# Altium PCB ECOSYNC.PcbDoc
Units mm, origin at the board's own origin, x right, y up, seen from the top; angles counter-clockwise.
Board outline 87 x 43 mm, 2 copper layers (Top Layer, Bottom Layer), stack 1.571 mm thick; 23 components, 21 nets, 89 pads, 11 vias.
Unrouted connection lines stored in the file: 1.
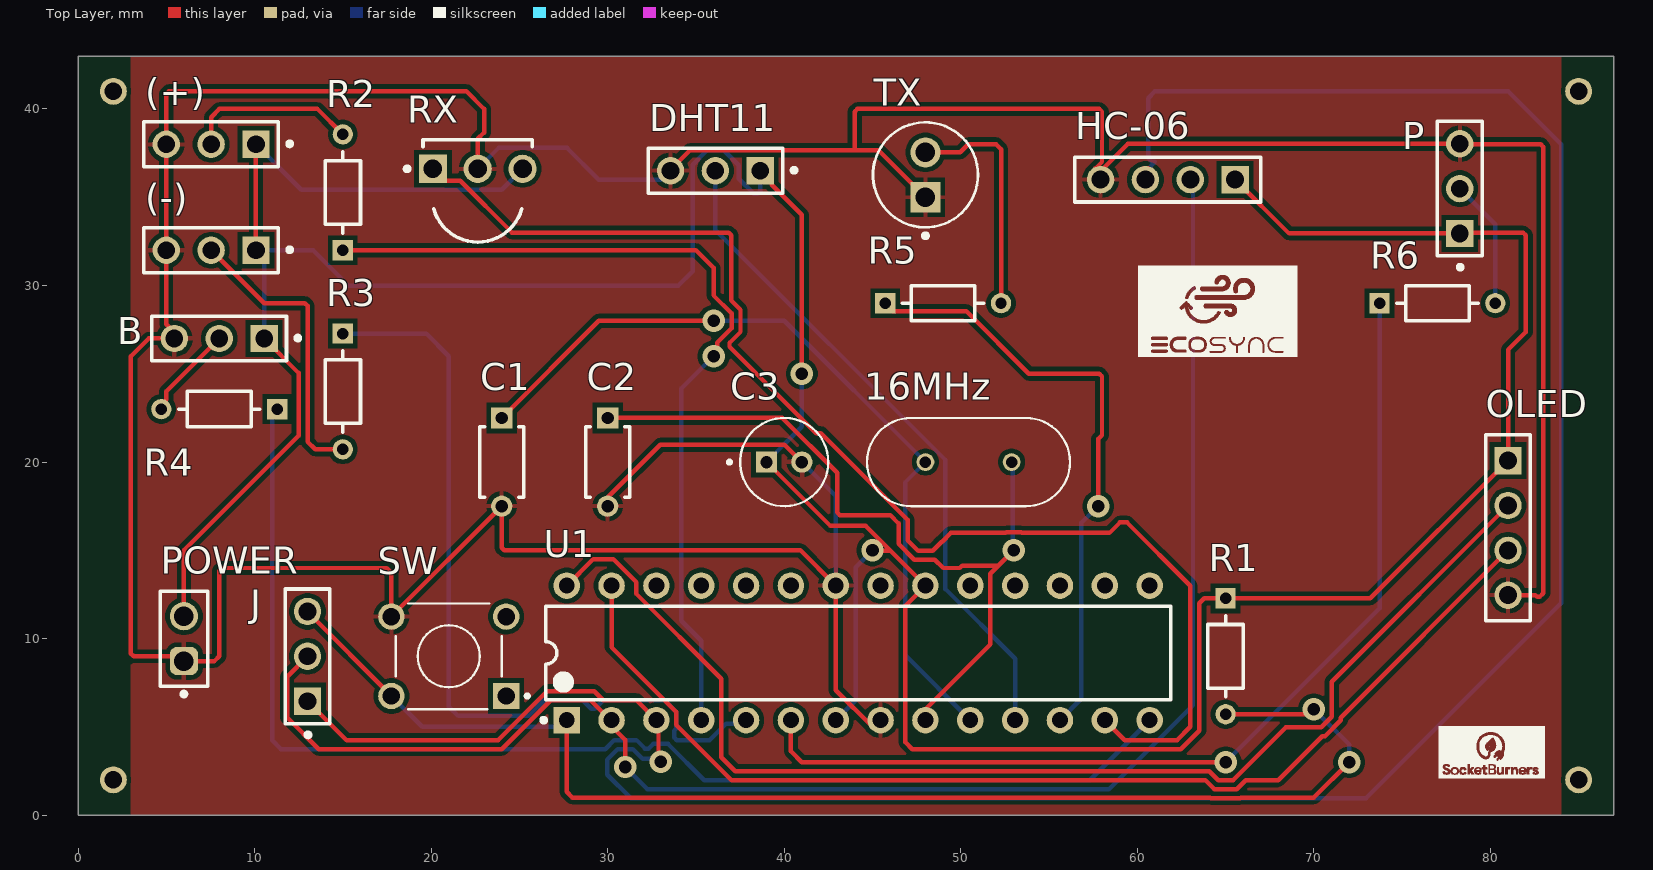
[diagram p0: Top Layer view]
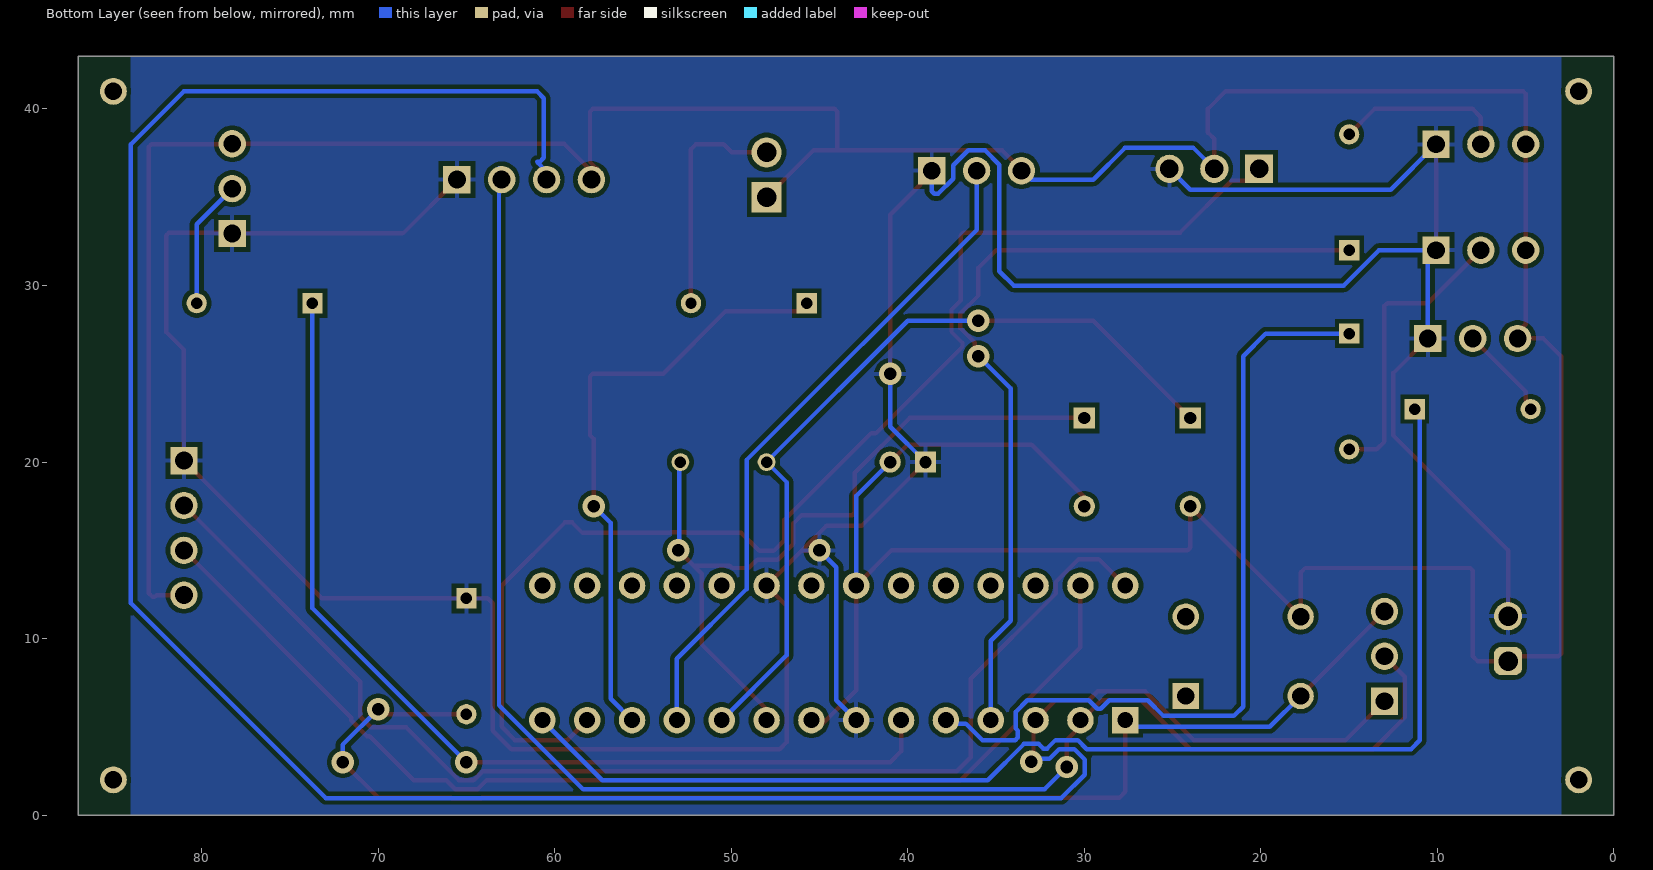
[diagram p1: Bottom Layer view, seen from below]
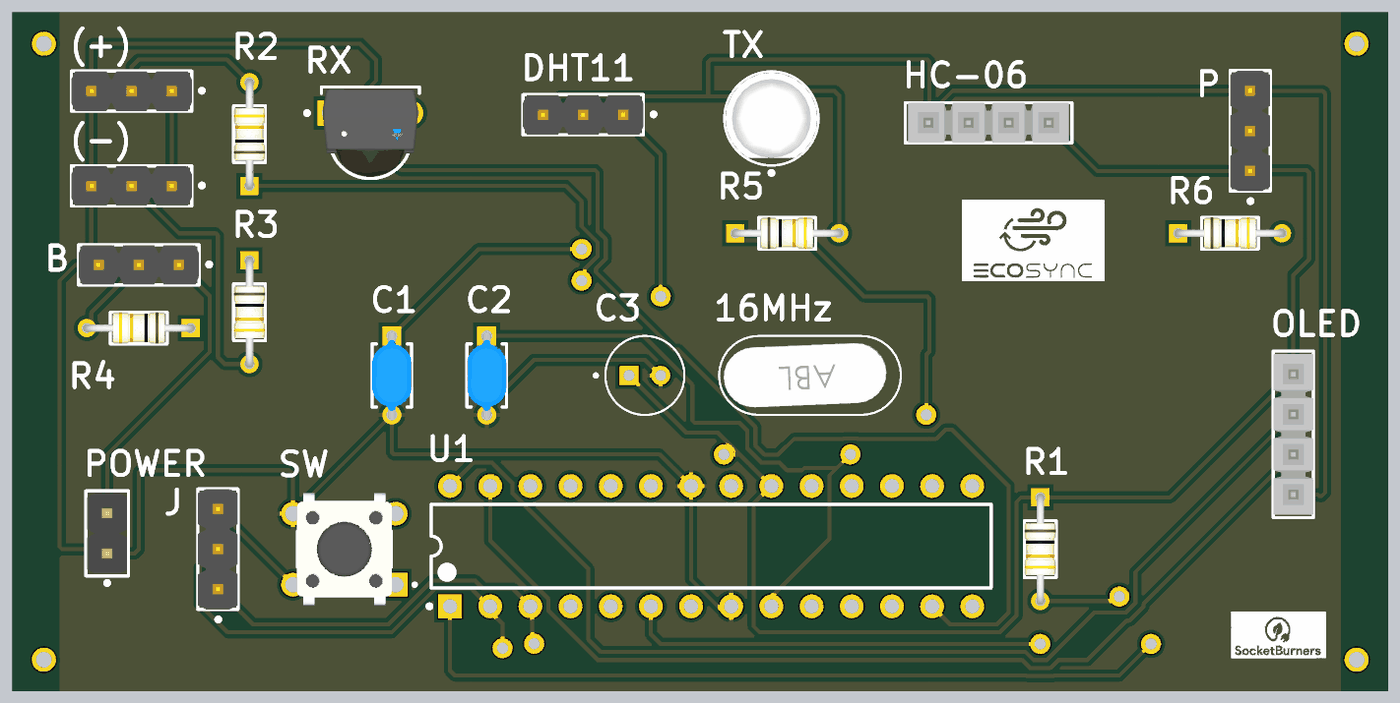
[diagram p2: 3D render of the assembled board from above, using the file's embedded part models]

## Layer stack, top to bottom
Top Solder: solder mask 0.0102, Solder Resist, Dk 3.5
Top Layer: signal copper 0.0356
Dielectric 1: dielectric 1.5, FR-4, Dk 4.8
Bottom Layer: signal copper 0.0356
Bottom Solder: solder mask 0.0102, Solder Resist, Dk 3.5

## Board outline
0,0 87,0 87,43 0,43

## Design rules (kind name [scope] priority, off if disabled: settings)
AssemblyTestpoint [All] p1: testpointundercomponent=TRUE minsize=1.016 maxsize=2.54 preferedsize=1.524 minholesize=0 maxholesize=1.016 preferedholesize=0.813 testpointgrid=0.025 usegrid=TRUE gridoriginx=2 gridoriginy=1 gridtolerance=0 allowsidetop=TRUE allowsidebottom=TRUE
Clearance [All] p1: gap=0.254 ignorepadtopadclearanceinfootprint=FALSE ismatrix=TRUE
ComponentClearance [All] p1: gap=0.1 collisioncheckmode=3 verticalgap=0.254 showdistances=FALSE
FabricationTestpoint [All] p1: side=3 testpointundercomponent=TRUE minsize=1.016 maxsize=2.54 preferedsize=1.524 minholesize=0 maxholesize=1.016 preferedholesize=0.813 testpointgrid=0.025 allowsidetop=TRUE allowsidebottom=TRUE usegrid=TRUE gridoriginx=2 gridoriginy=1 gridtolerance=0
HoleSize [All] p1: absolutevalues=TRUE maxlimit=2 minlimit=0.02 maxpercent=80.000 minpercent=20.000
PolygonConnect [All] p1: connectstyle=Relief reliefconductorwidth=0.254 reliefentries=4 polygonreliefangle="90 Angle" airgapwidth=0.254
RoutingVias [All] p1: holewidth=0.711 width=1.27 viastyle="Through Hole" minholewidth=0.711 minwidth=1.27 maxholewidth=0.711 maxwidth=1.27
SilkToSilkClearance [All] p1: silktosilkclearance=0.24
SilkToSolderMaskClearance [IsPad] p1: minsilkscreentomaskgap=0.237 clearancetoexposedcopper=TRUE
SolderMaskExpansion [All] p1: expansion=0.102 istentingtop=FALSE
Width [All] p1: maxlimit=0.254 minlimit=0.254 preferedwidth=0.254
24 further rules are at their usual default settings.

## Components (designator, comment, footprint, x,y, rotation, side; value= is the part's Value field where it differs from the comment)
16MHz "ABL-16.000MHZ-B2" XTAL_HC49P488W46L1150T500H350 50.44,20 r0 top
(+) "90120-0763" FP-90120-0763-MFG 7.54,38 r180 top
(-) "90120-0763" FP-90120-0763-MFG 7.54,32 r180 top
B "90120-0763" FP-90120-0763-MFG 8,27 r180 top
C1 "RDE5C2A220J0M1H03A" FP-RDE0M1-MFG 24,20 r270 top
C2 "RDE5C2A220J0M1H03A" FP-RDE0M1-MFG 30,20 r270 top
C3 "0.1uF" CAPPRD200W50D550H1250 40,20 r0 top
DHT11 "90120-0763" FP-90120-0763-MFG 36.103,36.503 r180 top
HC-06 "TSW-104-08-L-S" SMTC-TSW-104-08-X-S 65.54,36 r180 top
J "90120-0763" FP-90120-0763-MFG 13,9 r90 top
OLED "TSW-104-08-L-S" SMTC-TSW-104-08-X-S 81,20.08 r270 top
P "90120-0763" FP-90120-0763-MFG 78.267,35.487 r90 top
POWER "61300211121" 61300211121 6,10 r90 top
R1 "10k" FP-CF18-MFG 65,9 r270 top value=10kΩ
R2 "CF18JT10K0" FP-CF18-MFG 15,35.28 r90 top value=10kΩ
R3 "CF18JT10K0" FP-CF18-MFG 15,24 r270 top value=10kΩ
R4 "CF18JT10K0" FP-CF18-MFG 8,23 r180 top value=10kΩ
R5 "CF18JT10K0" FP-CF18-MFG 49,29 r0 top value=10kΩ
R6 "CF18JT10K0" FP-CF18-MFG 77,29 r0 top value=10kΩ
RX "TSOP4836" FP-6_550-5169_01-4-MFG 22.641,35.36 r270 top
SW "1825910-6" SW_1825910-6-4 21,9 r180 top
TX "TSFF5210" FP-6_544-5258_09-4-MFG 48,36.27 r90 top
U1 "ATmega328P-PU" 28P3 44.19,9.19 r90 top

## Footprints (in the part's own frame and the unit in brackets; to place one, negate y for a bottom-side part, rotate by r counter-clockwise, add the part's x,y. Pads: shape width x height; smd on the part's side, far side on the other; paste and mask are expansions set on the pad)
28P3 [mm] "28-Pin Plastic Dual In-Line Package (PDIP)"
  rect 1.5x1.5 hole 0.9: 1(-3.81,16.51)
  round 1.5 hole 0.9: 2(-3.81,13.97) 3(-3.81,11.43) 4(-3.81,8.89) 5(-3.81,6.35) 6(-3.81,3.81) 7(-3.81,1.27) 8(-3.81,-1.27) 9(-3.81,-3.81) 10(-3.81,-6.35) 11(-3.81,-8.89) 12(-3.81,-11.43) 13(-3.81,-13.97) 14(-3.81,-16.51) 15(3.81,-16.51) 16(3.81,-13.97) 17(3.81,-11.43) 18(3.81,-8.89) 19(3.81,-6.35) 20(3.81,-3.81) 21(3.81,-1.27) 22(3.81,1.27) 23(3.81,3.81) 24(3.81,6.35) 25(3.81,8.89) 26(3.81,11.43) 27(3.81,13.97) 28(3.81,16.51)
  silkscreen extent -3.93,-17.7 2.65,17.93, body extent -3.6,-17.65 3.6,17.65, height 4.58
61300211121 [mm] "Pin Header, pitch 2.54 mm, THT, Vertical, single row, 2p"
  rrect50% 1.6x1.6 hole 1.1: 1(-1.27,0)
  round 1.6 hole 1.1: 2(1.27,0)
  silkscreen extent -3.26,-1.35 2.69,1.35, body extent -2.54,-1.27 2.54,1.27, height 8.57
CAPPRD200W50D550H1250 [mm]
  rect 1.208x1.208 hole 0.7: 1(-1,0)
  round 1.208 hole 0.7: 2(1,0)
  silkscreen extent -3.2,-2.5 2.5,2.5
FP-6_544-5258_09-4-MFG [mm]
  rect 1.7x1.7 hole 1.1 paste-2539.97 mask+0: 1(-1.27,0)
  round 1.7 hole 1.1 paste-2539.97 mask+0: 2(1.27,0)
  silkscreen extent -3.57,-2.98 2.97,2.97, body extent -3.08,-3.08 3.08,3.08, height 0.25
FP-6_550-5169_01-4-MFG [mm]
  rect 1.6x1.6 hole 1.05 paste-2539.97 mask+0: 1(-1.25,-2.54)
  round 1.6 hole 1.05 paste-2539.97 mask+0: 2(-1.25,0) 3(-1.25,2.54)
  silkscreen extent -2.9,-4.12 2.9,3.1, body extent -3,-3.44 3,3.44, height 0.25
FP-90120-0763-MFG [mm]
  rect 1.55x1.55 hole 1 paste-2539.97 mask+0: 1(-2.54,0)
  round 1.55 hole 1 paste-2539.97 mask+0: 2(0,0) 3(2.54,0)
  silkscreen extent -4.58,-1.27 3.81,1.27, body extent -3.91,-1.37 3.91,1.37, height 0.25
FP-CF18-MFG [mm]
  rect 1.15x1.15 hole 0.65 paste-2539.97 mask+0: 1(-3.28,0)
  round 1.15 hole 0.65 paste-2539.97 mask+0: 2(3.28,0)
  silkscreen extent -2.3,-1 2.3,1, body extent -3.96,-1.1 3.96,1.1, height 0.25
FP-RDE0M1-MFG [mm]
  rect 1.2x1.2 hole 0.7 paste-2539.97 mask+0: 1(-2.5,0)
  round 1.2 hole 0.7 paste-2539.97 mask+0: 2(2.5,0)
  silkscreen extent -2,-1.25 2,1.25, body extent -3.2,-1.35 3.2,1.35, height 0.25
SMTC-TSW-104-08-X-S [mm] ".025 SQ Post Terminal Strip Assembly, 1x4 Pins, Vertical, 2.54mm Pitch, Male"
  rect 1.55x1.55 hole 1.02: 1(0,0)
  round 1.55 hole 1.02: 2(2.54,0) 3(5.08,0) 4(7.62,0)
  silkscreen extent -1.46,-1.27 9.08,1.27, body extent -1.27,-1.27 8.89,1.27, height 8.38
SW_1825910-6-4 [mm]
  rect 1.498x1.498 / inner round 1.498 / far side rect 1.498x1.498 hole 0.99: 1(-3.25,2.25)
  round 1.498 hole 0.99: 2(3.25,2.25) 3(-3.25,-2.25) 4(3.25,-2.25)
  silkscreen extent -4.54,-3 3,3, body extent -3,-3.9 3,3.9, height 5.01
XTAL_HC49P488W46L1150T500H350 [mm]
  round 1.007 hole 0.657: 1(-2.44,0) 2(2.44,0)
  silkscreen extent -5.75,-2.5 5.75,2.5, body extent -6.16,-2.72 5.54,2.75, height 2.79

## Part data
16MHz: "HC/49US (AT49) MICROPROCESSOR CRYSTAL", Package="HC-49/US ABRACON", Availability="In Stock", Check_prices=https://www.snapeda.com/parts/ABL-16.000MHZ-B2/Abracon+LLC/view-part/?ref=eda, MF=Abracon, MP=ABL-16.000MHZ-B2, Price=None, Purchase-URL=https://pricing.snapeda.com/search/part/ABL-16.000MHZ-B2/?ref=eda, SnapEDA_Link=https://www.snapeda.com/parts/ABL-16.000MHZ-B2/Abracon+LLC/view-part/?ref=snap
(+) (-) B DHT11 J P: library part CMP-04776-000084-1, "CONN HEADER VERT 3POS 2.54MM", Current Rating=3A, Manufacturer=Molex, Temperature="-55°C to +125°C", Temperature Range High=+125°C, Temperature Range Low=-55°C, Voltage Rating=350V, Automotive=No, Category=Conn, ComponentLink2Description=Datasheet, ComponentLink2URL=https://www.molex.com/webdocs/datasheets/pdf/en-us/0901200763_PCB_HEADERS.pdf, Conn Gender=Male, Conn Orientation=Vertical, Contact Material=Gold,Nickel, Device Class L1=Connectors, Device Class L2="Headers and Wire Housings", Device Class L3=unset, Digikey Description="CONN HEADER VERT 3POS 2.54MM", Footprint Url=https://www.molex.com/pdm_docs/sd/901200763_sd.pdf, Height=5.8mm, Lead Free=Yes, Manufacturer Part Number=90120-0763, Mouser Description="Board-To-Board Connector, C-Grid III 90120 Series, Through Hole, Header, 3, 2.54 mm", Number of Contacts=3, Number Of Rows=1, Octopart=https://octopart.com/90120-0763-molex-655433, Package=90120-0763, Pitch=2.54mm, RoHS=TRUE
C1 C2: library part CMP-06035-022985-1, "Ceramic Capacitor 22pF ±5% 100V C0G Radial", Capacitance=22pF, Case/Package=Radial, Dielectric=C0G, Max Operating Temperature=125°C, Min Operating Temperature=-55°C, Package Quantity=1, Resistor Type=Ceramic, Tolerance=5%, Voltage Rating=100V, Height=3.5mm, Height - Seated (Max)=0.236inch, Lead Diameter=0.5mm, Lead Free="Lead Free", Lead Pitch=0.197inch, Length=0.157inch, Mount="Through Hole", Packaging="Cut Tape", Termination=Radial, Voltage Rating (DC)=100V, Width=0.098inch
C3: library part UVR1H0R1MDD, "0.1ÂµF 50V Aluminum Electrolytic Capacitors Radial, Can 2000 Hrs @ 85Â°C", Package="Radial Nichicon", Availability=Warning, DigiKey-Purchase-URL=https://snapeda.com/shop?store=DigiKey&id=1435228, MF=Nichicon, Mouser-Purchase-URL=https://snapeda.com/shop?store=Mouser&id=1435228, MP=UVR1H0R1MDD, Price=None, SnapEDA_Link=https://www.snapeda.com/parts/UVR1H0R1MDD/Nichicon/view-part/1435228/?ref=snap
HC-06 OLED: library part CMP-1024-00358-1, "0.025\" SQ Post Header, Through-hole, Vertical, -55 to 125 degC, 2.54 mm Pitch, 4-Pin, Male, RoHS", Manufacturer=Samtec, Temperature Range="-55 to 125 degC", ComponentLink1Description="Manufacturer URL", ComponentLink1URL=http://www.samtec.com, ComponentLink2Description=Datasheet, ComponentLink2URL=http://www.samtec.com/documents/webfiles/pdf/TSW_TH.PDF, ComponentLink3Description="Package Specification", ComponentLink3URL=http://www.samtec.com/documents/webfiles/cpdf/TSW-XXX-XX-XXX-X-XX-XXX-MKT.pdf, DatasheetVersion=F-214, Mounting Technology=Through-hole, Orientation=Vertical, PackageDescription=".025[0.64] SQ. Post Terminal Strip Assembly", PackageReference=TSW-104-08-X-S, PackageVersion="DM, 8/1988", PartNumber=TSW-104-08-L-S, Pitch="2.54 mm", RoHS=True
POWER: library part CMP-1712-00002-6, Color=Black, Contact Resistance=20mΩ, Current Rating=3A, Max Operating Temperature=125°C, Min Operating Temperature=-40°C, Operating Supply Voltage=250V, Connector Type="Male Pin", Contact Gender=Male, Contact Material=Copper, Contact Mating Length=5.9944mm, Contact Plating=Gold, Gender=Male, Height=8.94mm, Housing Material=PBT, Lead Free="Lead Free", Lead Pitch=2.54mm, Mount="Through Hole", NexarPartId=20081794, Number of Contacts=2, Number of Pins=2, Number of Positions=2, Number Of Rows=1, Orientation=Vertical, Packaging=Bulk, Pitch=2.54mm, REACH SVHC="No SVHC", RoHS=Compliant, Termination="Through Hole", Voltage Rating=250V
R1: library part CMP-26528-000002-1, "RES 10K OHM 1/8W 5% CF AXIAL", Manufacturer="Stackpole Electronics", Manufacturer Part Number=CF18JT10K0, Package=CF18, Power Rating=0.125W, Resistance=10kΩ, Temperature="-55°C to +155°C", Temperature Coefficient=0-500ppm/°C, Temperature Range High=+155°C, Temperature Range Low=-55°C, Tolerance=5%, Voltage Rating=250V, Automotive=No, Category=Res, ComponentLink2Description=Datasheet, ComponentLink2URL=http://www.seielect.com/Catalog/SEI-CF_CFM.pdf, Composition="Carbon Film", Device Class L1="Passive Components", Device Class L2=Resistors, Device Class L3="Through-Hole Resistors", Digikey Description="RES 10K OHM 1/8W 5% CF AXIAL", Height=2mm, Ipc Land Pattern Name=RESAD656W65L360D200, Lead Free=Yes, Octopart=https://octopart.com/cf18jt10k0-stackpole+electronics-19205642, RoHS=TRUE, Series=CF
R2 R3 R4 R5 R6: library part CMP-26528-000002-1, "RES 10K OHM 1/8W 5% CF AXIAL", Manufacturer="Stackpole Electronics", Package=CF18, Power Rating=0.125W, Resistance=10kΩ, Temperature="-55°C to +155°C", Temperature Coefficient=0-500ppm/°C, Temperature Range High=+155°C, Temperature Range Low=-55°C, Tolerance=5%, Voltage Rating=250V, Automotive=No, Category=Res, ComponentLink2Description=Datasheet, ComponentLink2URL=http://www.seielect.com/Catalog/SEI-CF_CFM.pdf, Composition="Carbon Film", Device Class L1="Passive Components", Device Class L2=Resistors, Device Class L3="Through-Hole Resistors", Digikey Description="RES 10K OHM 1/8W 5% CF AXIAL", Height=2mm, Ipc Land Pattern Name=RESAD656W65L360D200, Lead Free=Yes, Manufacturer Part Number=CF18JT10K0, Octopart=https://octopart.com/cf18jt10k0-stackpole+electronics-19205642, RoHS=TRUE, Series=CF
RX: library part CMP-00030-55401809-1, "TSOP4836 TSOP48 Series 5.5 V 36 kHz Through Hole IR Receiver Modules for Remote Control", Case/Package=TSOP, Frequency=36kHz, Max Operating Temperature=85°C, Max Supply Voltage=5.5V, Min Operating Temperature=-25°C, Min Supply Voltage=2.7V, Min Supply Voltage (DC)=2.5V, Nominal Supply Current=950µA, Operating Supply Current=700µA, Output Current=5mA, Power Dissipation=10mW, Contact Plating=Tin, Height=6.95mm, Lead Free="Lead Free", Lead Length=23.6mm, Length=6mm, Max Supply Voltage (DC)=5.5V, Mount="Through Hole", NexarPartId=55401809, Number of Pins=3, Orientation="Side View", Radiation Hardening=No, REACH SVHC=Unknown, RoHS=Compliant, Schedule B=8541409500, Sensing Distance=45m, Viewing Angle=45°, Wavelength=950nm, Width=5.6mm
SW: "Switch Push Button OFF (ON) SPST Round Button 0.05A 24VDC Momentary Contact PC Pins Thru-Hole", Package=None, Check_prices=https://www.snapeda.com/parts/1825910-6/TE+Connectivity+ALCOSWITCH+Switches/view-part/?ref=eda, Digi-Key_Part_Number=450-1650-ND, MF="TE Connectivity", MP=1825910-6, Purchase-URL=https://pricing.snapeda.com/search/part/1825910-6/?ref=eda, SnapEDA_Link=https://www.snapeda.com/parts/1825910-6/TE+Connectivity+ALCOSWITCH+Switches/view-part/?ref=snap
TX: library part CMP-00030-41223146-1, "TSFF5210 TSFF5210 IR LED, 870nm, T-1 3/4 (5mm) Through Hole package", Case/Package=Radial, Forward Current=100mA, Forward Voltage=1.5V, Max Operating Temperature=85°C, Min Operating Temperature=-40°C, Power Dissipation=180W, Power Rating=250mW, Reverse Voltage=5V, Contact Plating=Tin, Depth=5.8mm, Lead Free="Lead Free", Length=5.8mm, Lens Style="Circular, Colorless, Diffused, Round", Mount="Through Hole", NexarPartId=41223146, Number of Elements=1, Number of LEDs=1, Number of Pins=2, Orientation="Top View", Packaging=Bulk, Peak Wavelength=870nm, Radiation Hardening=No, REACH SVHC=Unknown, Rise Time=15ns, RoHS=Compliant, Schedule B="8541402000, 8541402000", Test Current=100mA, Viewing Angle=20°, Wavelength=870nm
U1: library part CMP-0095-00013-2, "8-bit AVR Microcontroller, 32KB Flash, 1KB EEPROM, 2KB SRAM, 28-pin PDIP, Industrial Grade (-40°C to 85°C)", ComponentLink1Description="Manufacturer URL", ComponentLink1URL=http://www.atmel.com/, ComponentLink2Description="ATmega48A/48PA/88A/88PA/168A/168PA/328/328P Datasheet", ComponentLink2URL=http://www.atmel.com/dyn/resources/prod_documents/8271.pdf, ComponentLink3Description="ATmega48A/48PA/88A/88PA/168A/168PA/328/328P Summary", ComponentLink3URL=http://www.atmel.com/dyn/resources/prod_documents/8271S.pdf, DatasheetVersion="revD, May-2011", PackageDescription="28-lead (0.300\"/7.62mm Wide) Plastic Dual Inline Package (PDIP)", PackageReference=28P3, PackageVersion="revB, Sep-2001", RevisionNote="DatasheetVersion updated. URLs added."

## Free pads (board coordinates)
  round 1.524 hole 1: 7(85,2) 8(85,41) 9(2,41) 10(2,2)

## Via types
v1: diameter 1.27, hole 0.711, Top Layer to Bottom Layer, 11 vias

## Nets (pads, with @x,y where several pads share a name; then routed paths per layer and width w, separated by ;. In a path a pad name is that pad's centre, name@x,y a point inside that pad or via, vN(x,y) a via of type N, cw(c..) or ccw(c..) an arc to the next point about the centre after c; other vN are vias at no path point)
+5: (+).1 (-).1 B.1 C3.1 DHT11.1 HC-06.1 OLED.1 P.1 POWER.2 R1.1 RX.3 U1.7 U1.20 | length 214.1
  Top Layer w0.254: POWER.2 6,15 12.492,21.492 12.492,25.048 B.1 ; 10,38 10.08,38 10.08,32 ; RX.3@25,37 25.181,36.819 RX.3 ; DHT11.1 38.643,36.357 39,36 39.146,36 39.291,35.855 39.291,35.709 41,34 v1(41,25) ; C3.1 42.619,16.381 44.619,16.381 46.016,14.984 ; v1(45,15) 45.016,14.984 46.016,14.984 ; HC-06.1 68.593,32.947 P.1 78.32,33 81.851,33 82,32.851 82,27.364 81,26.364 OLED.1 73.2,12.28 R1.1 63.788,12.28 63.508,12 63.508,4.79 62.459,3.741 47.259,3.741 46.869,4.131 46.869,11.869 U1.20 46.016,14.984
  Bottom Layer w0.254: 10.08,38 12.651,35.429 24,35.429 RX.3 ; B.1 10.54,31.54 10.08,32 13.311,32 15.311,30 34,30 34.812,30.812 34.812,36.847 35.624,37.659 36.582,37.659 37.433,36.808 37.433,36.049 38.284,35.198 38.494,35.198 38.643,35.347 DHT11.1 ; C3.1 41,22 v1(41,25) ; U1.7@43,5.46 44.051,6.511 44.051,14.051 v1(45,15) ; R1.1@65,12 R1.1 ; OLED.1@81,20 OLED.1
A4: OLED.3 U1.27 | length 63.7
  Top Layer w0.254: U1.27 30.22,9.519 33.891,5.848 33.891,5.109 37.016,1.984 63.861,1.984 64.369,1.476 65.631,1.476 66.139,1.984 67.984,1.984 70.476,4.476 70.631,4.476 71.524,5.369 71.524,5.524 OLED.3
A5: OLED.2 U1.28 | length 69.7
  Top Layer w0.254: U1.28 29.172,14.492 30.327,14.492 31.629,13.19 31.629,12.531 36.431,7.729 36.431,3.287 37.226,2.492 64.071,2.492 64.579,1.984 65.421,1.984 68.421,4.984 70.421,4.984 71.016,5.579 71.016,7.556 OLED.2
D2: R2.1 U1.4 | length 49.1
  Top Layer w0.254: R2.1 35,32 36,31 36,29.437 37.016,28.421 37.016,27.579 36.194,26.758 36.194,26.194 v1(36,26)
  Bottom Layer w0.254: U1.4 35.3,9.878 34.169,11.009 34.169,24.169 v1(36,26)
D3: R3.1 U1.5 | length 46.6
  Bottom Layer w0.254: R3.1 19.72,27.28 21,26 21,6.149 21.529,5.62 25.52,5.62 26.411,6.511 28.588,6.511 29.064,6.034 29.275,6.034 29.751,6.511 33.228,6.511 33.891,5.848 33.891,4.911 33.773,4.794 33.773,4.398 33.922,4.249 35.768,4.249 36.709,5.189 37.649,5.189 U1.5
D4: R6.1 U1.6 | length 56.5
  Top Layer w0.254: U1.6 40.38,3.62 41,3 v1(65,3) ; R6.1 R6.1@74,29
  Bottom Layer w0.254: v1(65,3) 73.72,11.72 R6.1
D5: DHT11.2 U1.11 | length 38.2
  Bottom Layer w0.254: DHT11.2 36.103,33.148 49.131,20.12 49.131,12.809 53.08,8.86 U1.11
D6: R5.1 U1.12 | length 34.6
  Top Layer w0.254: R5.1 46,29 46,28.72 46.168,28.552 50.308,28.552 53.86,25 57.851,25 58,24.851 58,21.519 57.789,21.309 v1(57.789,17.508)
  Bottom Layer w0.254: U1.12 56.832,6.592 56.832,16.55 v1(57.789,17.508)
D7: RX.1 U1.13 | length 72.6
  Top Layer w0.254: RX.1 20.774,35.937 21.644,35.937 24.581,33 36.851,33 37,32.851 37,29.155 37.524,28.631 37.524,27.369 36.901,26.746 36.901,26.536 41.802,21.635 42.083,21.635 46.984,16.734 46.984,15.579 47.579,14.984 48.421,14.984 48.929,15.492 48.945,15.492 49.437,15.984 52.547,15.984 52.579,16.016 53.421,16.016 53.453,15.984 58.421,15.984 59.016,16.579 59.421,16.579 63,13 63,5 62.249,4.249 59.291,4.249 U1.13
D8: R4.1 U1.14 | length 71.6
  Bottom Layer w0.254: R4.1 11,22.72 11,4.236 11.495,3.741 29.856,3.741 30.369,4.254 31.631,4.254 32.111,3.774 32.321,3.774 32.579,4.032 33.421,4.032 35.469,1.984 57.304,1.984 U1.14
GND: (+).3 (-).3 B.3 C1.2 C2.2 C3.2 DHT11.3 HC-06.4 OLED.4 P.3 POWER.1 RX.2 SW.4 TX.1 U1.8 U1.22 | length 242
  Top Layer w0.254: SW.4@17.641,11.25 SW.4 ; RX.2 22.641,38.308 23,38.667 23,40 22,41 5.149,41 5,40.851 5,38 5,32 5,27.811 5.46,27.351 B.3 4,27 3,26 3,9.149 3.149,9 5.73,9 POWER.1 7.73,8.73 8,9 8,13.851 8.149,14 17.5,14 17.75,13.75 SW.4 ; C2.2 30,18 32.985,20.985 40.015,20.985 C3.2 ; DHT11.3 33.563,36.563 34.659,37.659 44,37.659 ; U1.8 45.38,5.38 45,5 42.92,7.08 U1.22 40.92,15 24.149,15 24,15.149 C1.2 SW.4 ; TX.1 45.341,37.659 44,37.659 ; OLED.4 81,12 81.46,12.46 82.54,12.46 82.641,12.359 82.783,12.359 83,12.576 83,37.851 82.851,38 78.294,38 P.3 59.471,38.027 58.074,36.63 57.63,36.63 58,37 58,39.851 57.851,40 44.149,40 44,39.851 44,37.659
  Bottom Layer w0.254: RX.2 23.822,37.791 27.698,37.791 29.489,36 33,36 33.503,36.503 DHT11.3 ; C3.2 42.92,18.08 U1.22
Net16MHz_1: 16MHz.1 C1.1 U1.10 | length 46.3
  Top Layer w0.254: C1.1 29.5,28 v1(36,28)
  Bottom Layer w0.254: v1(36,28) 40,28 16MHz.1 46.869,18.869 46.869,9.051 U1.10 U1.10@50.62,5.38
Net16MHz_2: 16MHz.2 C2.1 U1.9 | length 44.6
  Top Layer w0.254: C2.1 39.893,22.5 43,19.393 43,17.149 43.149,17 46,17 46.476,16.524 46.476,15.369 47.369,14.476 48.524,14.476 49,14 49.94,14 50.071,14.131 52.131,14.131 ; U1.9 48,6 51.671,9.671 51.671,13.671 52.131,14.131 ; v1(53,15) 52.131,14.131
  Bottom Layer w0.254: v1(53,15) 52.94,15.06 52.94,19.94 16MHz.2 16MHz.2@53,20
Net(+)_2: (+).2 R2.2 | length 10.4
  Top Layer w0.254: 7.54,38 8,38 7.54,38.46 7.54,39.54 8,40 13.56,40 R2.2
Net(-)_2: (-).2 R3.2 | length 16.9
  Top Layer w0.254: 7.54,32 8,32 7.963,31.963 7.963,31.577 10.54,29 12.851,29 13,28.851 13,21.149 13.429,20.72 R3.2
NetB_2: B.2 R4.2 | length 5.6
  Top Layer w0.254: R4.2 5,23 4.891,23.109 4.891,23.414 5,23.522 5,24 B.2
NetJ_3: J.3 R1.2 SW.2 U1.1 | length 76.6
  Top Layer w0.254: J.3 13,11.52 17.75,6.77 SW.2 ; U1.1 27.68,1.32 28,1 64.126,1 64.158,0.968 65.842,0.968 65.874,1 70,1 v1(72,3) ; R1.2 65,6 65.28,5.72 69.851,5.72 70,5.869 v1(70,6)
  Bottom Layer w0.254: SW.2 19.5,5 27.3,5 U1.1 ; R1.2 R1.2@65,6 ; v1(70,6) 72,4 v1(72,3)
NetP_2: P.2 R6.2 | length 8.1
  Top Layer w0.254: P.2@78,36 78.267,35.733 P.2 P.2@78.267,35.377
  Bottom Layer w0.254: P.2 80.28,33.474 R6.2
NetR5_2: R5.2 TX.2 | length 13.6
  Top Layer w0.254: TX.2 49.966,37.54 50.426,38 52,38 52.28,37.72 52.28,29.212 52.492,29 R5.2
RXD: HC-06.2 J.2 U1.2 | length 93
  Top Layer w0.254: J.2 11.844,7.844 11.844,5.527 13.63,3.741 24.002,3.741 26.772,6.511 29.033,6.511 30.22,5.324 U1.2@30.22,5.043 ; U1.2 U1.2@30.22,5.043 ; v1(31,2.73) 31,4.263 U1.2@30.22,5.043
  Bottom Layer w0.254: v1(31,2.73) 32.254,1.476 58.395,1.476 63.154,6.235 HC-06.2@63.154,36.63
TXD: HC-06.3 J.1 U1.3 | length 144
  Top Layer w0.254: J.1 15.211,4.249 23.792,4.249 26.562,7.019 29.243,7.019 29.751,6.511 31.629,6.511 U1.3 32.88,5.26 32.88,3.136 v1(33,3.016) ; HC-06.3@60.37,36.63 HC-06.3@60.614,36.63
  Bottom Layer w0.254: v1(33,3.016) 32.833,3.183 31.984,3.183 31.421,3.746 30.579,3.746 29.984,3.151 29.984,2.298 31.314,0.968 72.968,0.968 84,12 84,38 81,41 61,41 60.614,40.614 60.614,37.229 60.843,37 61,37 60.921,36.921 60.63,36.63 HC-06.3@60.614,36.63
pads on no net: SW.1 SW.3 U1.15 U1.16 U1.17 U1.18 U1.19 U1.21 U1.23 U1.24 U1.25 U1.26

## Polygon pours and split planes (outlines as drawn)
+5 on Bottom Layer "+5_L02_P001" (solid, remove dead copper, pour order 1): 3,43 3,0 84,0 84,43
GND on Top Layer "GND_L01_P000" (solid, remove dead copper, pour order 0): 3,43 3,0 84,0 84,43

## Silkscreen, mask and mechanical layers (free items; w line width, h text height)
Top Overlay:
  drawing of 9 lines, arcs and shapes, not listed